# EAGLE board fordelings_board (EAGLE 5.07)
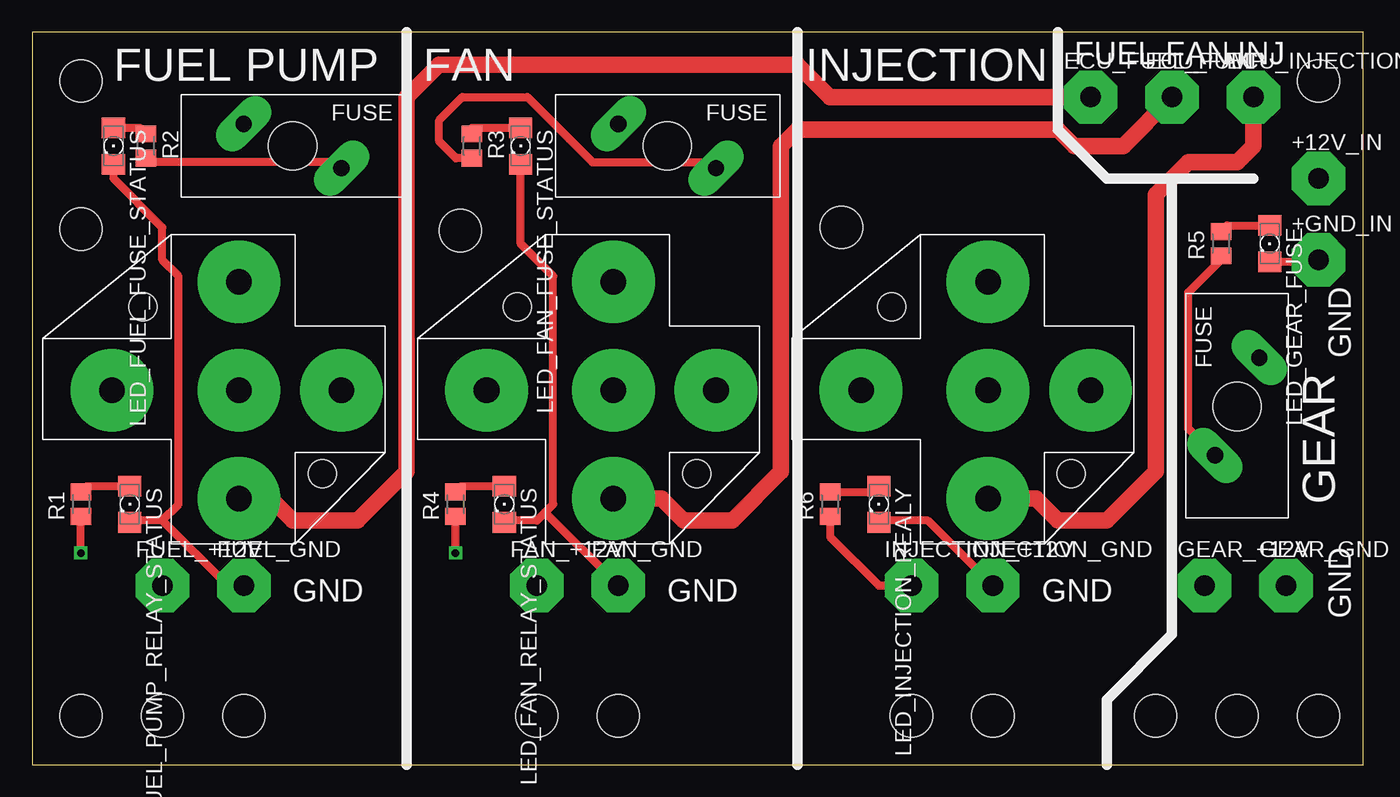
[diagram p0: board, top side]
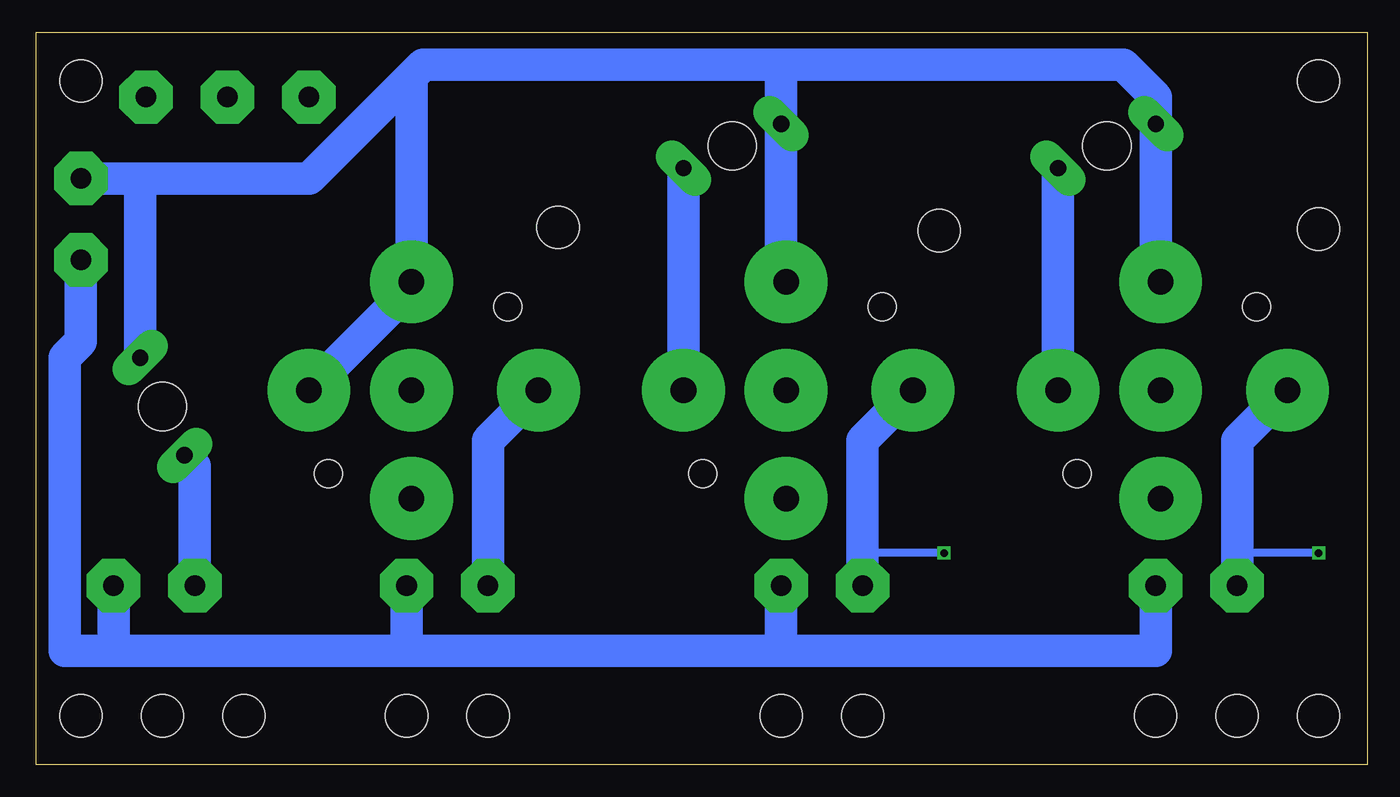
[diagram p1: board, bottom side, seen from below]

Size 103.81 x 57.14 mm. Coordinates in mm from the lower left corner, seen from the top.
Outline: 0,0 103.81,0 103.81,57.14 0,57.14 0,0
Copper layers (1*16): Top 0.035mm / dielectric 1.5mm / Bottom 0.035mm
Design rules "default": minimum track width 10mil, minimum drill 24mil, track to track 8mil, track to pad 8mil, pad to pad 8mil, via to via 8mil, smd to smd 8mil, copper to edge 40mil, drill to drill 8mil, minimum pad ring 10mil, minimum via ring 8mil, stop-mask expansion 4mil, vias tented up to drill 0mil, thermal gap 10mil

## Footprints (pad centres in the part's own frame; a part is rotated, then mirrored left to right if it is on the bottom)
4,16O1,6 = drill 1.6 pad 4.166 octagon: 1 0,0
FUSE_SOCKET_12V_30A = drill 2 pad 6.452 round: P$1 0,0; P$2 8,8.45; P$3 8,0; P$4 8,-8.45; P$5 17.9,0 | hole 2.2: 1.5,6.5; 15.5,-6.5
STAND-OFF = hole 3.302: 0,0
1206 = smd 1.6 x 1.803: A -1.422,0; C 1.422,0
M0805 = smd 1.3 x 1.6: 1 -0.95,0; 2 0.95,0
LITTE_FUSE_PAC = drill 1.27 pad 2.54 long: P$1 -1.73,-3.81; P$2 1.73,3.81 | hole 3.78: 0,0

## Placement (x,y rotation side)
+12V_IN  WIREPAD4,16O1,6  [4,16O1,6]  100.33,45.72 0 top
+GND_IN  WIREPAD4,16O1,6  [4,16O1,6]  100.33,39.37 0 top
ECU_FAN  WIREPAD4,16O1,6  [4,16O1,6]  88.9,52.07 0 top
ECU_FUEL_PUMP  WIREPAD4,16O1,6  [4,16O1,6]  82.55,52.07 0 top
ECU_INJECTION  WIREPAD4,16O1,6  [4,16O1,6]  95.25,52.07 0 top
FAN_+12V  WIREPAD4,16O1,6  [4,16O1,6]  39.37,13.97 0 top
FAN_GND  WIREPAD4,16O1,6  [4,16O1,6]  45.72,13.97 0 top
FUEL_+12V  WIREPAD4,16O1,6  [4,16O1,6]  10.16,13.97 0 top
FUEL_GND  WIREPAD4,16O1,6  [4,16O1,6]  16.51,13.97 0 top
FUEL_PUMP_RELAY  FUSE_SOCKET  [FUSE_SOCKET_12V_30A]  24.13,29.21 180 top
GEAR_+12V  WIREPAD4,16O1,6  [4,16O1,6]  91.44,13.97 0 top
GEAR_GND  WIREPAD4,16O1,6  [4,16O1,6]  97.79,13.97 0 top
INJECTION_+12V  WIREPAD4,16O1,6  [4,16O1,6]  68.58,13.97 0 top
INJECTION_GND  WIREPAD4,16O1,6  [4,16O1,6]  74.93,13.97 0 top
JP1  STAND-OFF  [STAND-OFF]  10.16,3.81 0 top
JP2  STAND-OFF  [STAND-OFF]  16.51,3.81 0 top
JP3  STAND-OFF  [STAND-OFF]  39.37,3.81 0 top
JP4  STAND-OFF  [STAND-OFF]  45.72,3.81 0 top
JP5  STAND-OFF  [STAND-OFF]  68.58,3.81 0 top
JP6  STAND-OFF  [STAND-OFF]  74.93,3.81 0 top
JP7  STAND-OFF  [STAND-OFF]  87.63,3.81 0 top
JP8  STAND-OFF  [STAND-OFF]  93.98,3.81 0 top
JP9  STAND-OFF  [STAND-OFF]  33.4,41.66 0 top
JP10  STAND-OFF  [STAND-OFF]  3.81,41.78 0 top
JP11  STAND-OFF  [STAND-OFF]  63.12,41.91 0 top
JP12  STAND-OFF  [STAND-OFF]  3.81,3.81 0 top
JP13  STAND-OFF  [STAND-OFF]  100.33,3.81 0 top
JP14  STAND-OFF  [STAND-OFF]  3.81,53.34 0 top
JP15  STAND-OFF  [STAND-OFF]  100.33,53.34 0 top
LED_FAN_FUSE_STATUS  [1206]  38.1,48.26 270 top
LED_FAN_RELAY_STATUS  [1206]  36.83,20.32 270 top
LED_FUEL_FUSE_STATUS  [1206]  6.35,48.26 270 top
LED_FUEL_PUMP_RELAY_STATUS  [1206]  7.62,20.32 270 top
LED_GEAR_FUSE  [1206]  96.52,40.64 270 top
LED_INJECTION_REALY  [1206]  66.04,20.32 270 top
R1  [M0805]  3.81,20.32 90 top
R2  [M0805]  8.89,48.26 270 top
R3  [M0805]  34.29,48.26 270 top
R4  [M0805]  33.02,20.32 90 top
R5  [M0805]  92.71,40.64 90 top
R6  [M0805]  62.23,20.32 90 top
U$1  FUSE_SOCKET  [FUSE_SOCKET_12V_30A]  82.55,29.21 180 top
U$2  FUSE_SOCKET  [FUSE_SOCKET_12V_30A]  53.34,29.21 180 top
U$3  LITTE_FUSE  [LITTE_FUSE_PAC]  93.98,27.94 180 top
U$4  LITTE_FUSE  [LITTE_FUSE_PAC]  20.32,48.26 90 top
U$5  LITTE_FUSE  [LITTE_FUSE_PAC]  49.53,48.26 90 top

## Library data of the parts
+12V_IN +GND_IN ECU_FAN ECU_FUEL_PUMP ECU_INJECTION FAN_+12V FAN_GND FUEL_+12V FUEL_GND GEAR_+12V GEAR_GND INJECTION_+12V INJECTION_GND = wirepad
FUEL_PUMP_RELAY U$1-U$5 = unicorn_v2
JP1-JP15 = SparkFun
LED_FAN_FUSE_STATUS LED_FAN_RELAY_STATUS LED_FUEL_FUSE_STATUS LED_FUEL_PUMP_RELAY_STATUS LED_GEAR_FUSE LED_INJECTION_REALY = led
R1-R6 = rcl

## Nets
+12V: +12V_IN.1 FUEL_PUMP_RELAY.P$4 U$1.P$1 U$1.P$4 U$2.P$4 U$3.P$1 U$4.P$2 U$5.P$2
ECU_FAN: ECU_FAN.1 U$2.P$2
ECU_FUEL_PUMP: ECU_FUEL_PUMP.1 FUEL_PUMP_RELAY.P$2
ECU_INJECTION: ECU_INJECTION.1 U$1.P$2
N$1: FUEL_PUMP_RELAY.P$1 R2.2 U$4.P$1
N$3: LED_FUEL_FUSE_STATUS.A R2.1
N$4: LED_FAN_RELAY_STATUS.A R4.2
N$5: R3.2 U$2.P$1 U$5.P$1
N$6: INJECTION_+12V.1 R6.1 U$1.P$5
N$7: GEAR_+12V.1 R5.1 U$3.P$2
N$8: LED_GEAR_FUSE.A R5.2
N$11: LED_INJECTION_REALY.A R6.2
N$12: FAN_+12V.1 R4.1 U$2.P$5
N$13: LED_FUEL_PUMP_RELAY_STATUS.A R1.2
N$14: FUEL_+12V.1 FUEL_PUMP_RELAY.P$5 R1.1
N$15: LED_FAN_FUSE_STATUS.A R3.1
PE: +GND_IN.1 FAN_GND.1 FUEL_GND.1 GEAR_GND.1 INJECTION_GND.1 LED_FAN_FUSE_STATUS.C LED_FAN_RELAY_STATUS.C LED_FUEL_FUSE_STATUS.C LED_FUEL_PUMP_RELAY_STATUS.C LED_GEAR_FUSE.C LED_INJECTION_REALY.C

## Tracks (layer width: path | path; a pad name or v marks a point on that pad's centre or on a via)
+12V
  Bottom 2.54: FUEL_PUMP_RELAY.P$4 16.51,38.04 U$4.P$2 16.51,52.07 19.05,54.61 45.72,54.61 | U$2.P$4 45.72,38.04 U$5.P$2 45.72,54.61 | 45.72,54.61 73.66,54.61 74.55,53.72 | 74.55,53.72 U$1.P$4 74.55,37.21 U$1.P$1 | 95.71,45.72 U$3.P$1 | 95.71,45.72 +12V_IN.1 | 95.71,45.72 82.55,45.72 74.55,53.72
ECU_FAN
  Top 1.27: U$2.P$2 49.09,20.76 50.8,19.05 54.61,19.05 58.42,22.86 58.42,48.26 59.69,49.53 80.01,49.53 81.28,48.26 85.09,48.26 ECU_FAN.1
ECU_FUEL_PUMP
  Top 1.27: FUEL_PUMP_RELAY.P$2 18.61,20.76 20.32,19.05 25.4,19.05 29.21,22.86 29.21,52.07 31.75,54.61 59.69,54.61 62.23,52.07 ECU_FUEL_PUMP.1
ECU_INJECTION
  Top 1.27: U$1.P$2 78.3,20.76 80.01,19.05 83.82,19.05 87.63,22.86 87.63,44.45 90.17,46.99 93.98,46.99 95.25,48.26 ECU_INJECTION.1
N$1
  Top 0.61: U$4.P$1 24.13,46.99 9.21,46.99 R2.2
  Bottom 2.54: FUEL_PUMP_RELAY.P$1 U$4.P$1
N$3
  Top 0.61: LED_FUEL_FUSE_STATUS.A 8.42,49.68 R2.1
N$4
  Top 0.61: LED_FAN_RELAY_STATUS.A 33.49,21.74 R4.2
N$5
  Top 0.61: R3.2 33.06,47.31 31.75,48.62 31.75,50.27 33.55,52.07 38.63,52.07 41.91,48.79 43.71,46.99 53.34,46.99 U$5.P$1
  Bottom 2.54: U$5.P$1 U$2.P$1
N$6
  Top 0.61: INJECTION_+12V.1 66.04,13.97 62.23,17.78 R6.1
  Bottom 2.54: INJECTION_+12V.1 68.58,25.28 U$1.P$5
N$7
  Top 0.61: R5.1 92.71,39.37 90.17,36.83 90.17,26.21 U$3.P$2
  Bottom 2.54: GEAR_+12V.1 91.44,23.32 U$3.P$2
N$8
  Top 0.61: LED_GEAR_FUSE.A 93.18,42.06 R5.2
N$11
  Top 0.61: R6.2 65.57,21.27 LED_INJECTION_REALY.A
N$12  (via drill 0.6)
  Top 0.61: v33.02,16.51 R4.1
  Bottom 0.61: v33.02,16.51 39.37,16.51
  Bottom 2.54: U$2.P$5 39.37,25.28 39.37,16.51 FAN_+12V.1
N$13
  Top 0.61: LED_FUEL_PUMP_RELAY_STATUS.A 4.28,21.74 R1.2
N$14  (via drill 0.6)
  Top 0.61: v3.81,16.51 R1.1
  Bottom 0.61: v3.81,16.51 10.16,16.51
  Bottom 2.54: FUEL_PUMP_RELAY.P$5 10.16,25.28 10.16,16.51 FUEL_+12V.1
N$15
  Top 0.61: LED_FAN_FUSE_STATUS.A 34.29,49.68 R3.1
PE
  Top 0.61: LED_FAN_FUSE_STATUS.C 38.1,40.64 40.64,38.1 40.64,20.32 40.01,19.68 | 40.01,19.68 39.37,19.05 36.98,19.05 LED_FAN_RELAY_STATUS.C | 10.16,19.05 11.43,20.32 11.43,38.1 10.16,39.37 10.16,41.91 6.35,45.72 LED_FUEL_FUSE_STATUS.C | 10.16,19.05 7.77,19.05 LED_FUEL_PUMP_RELAY_STATUS.C | FUEL_GND.1 15.24,13.97 10.16,19.05 | FAN_GND.1 40.01,19.68 | INJECTION_GND.1 69.85,19.05 66.19,19.05 LED_INJECTION_REALY.C | LED_GEAR_FUSE.C 100.18,39.22 +GND_IN.1
  Bottom 2.54: FUEL_GND.1 16.51,8.89 45.72,8.89 | 45.72,8.89 74.93,8.89 | 45.72,8.89 FAN_GND.1 | 74.93,8.89 INJECTION_GND.1 | 97.79,8.89 GEAR_GND.1 | 74.93,8.89 97.79,8.89 | 97.79,8.89 101.6,8.89 101.6,31.75 100.33,33.02 +GND_IN.1

## Text on the board
tPlace: FUEL | FAN | INJ | FUEL PUMP | FAN | INJECTION | GND | GEAR | GND | GND | GND | GND